# Altium PCB plug.PcbDoc
Units mm, origin at the board's own origin, x right, y up, seen from the top; angles counter-clockwise.
Board outline 151 x 86.38 mm, 2 copper layers (Top Layer, Bottom Layer); 17 components, 18 nets, 63 pads, 0 vias.
Unrouted connection lines stored in the file: 3.
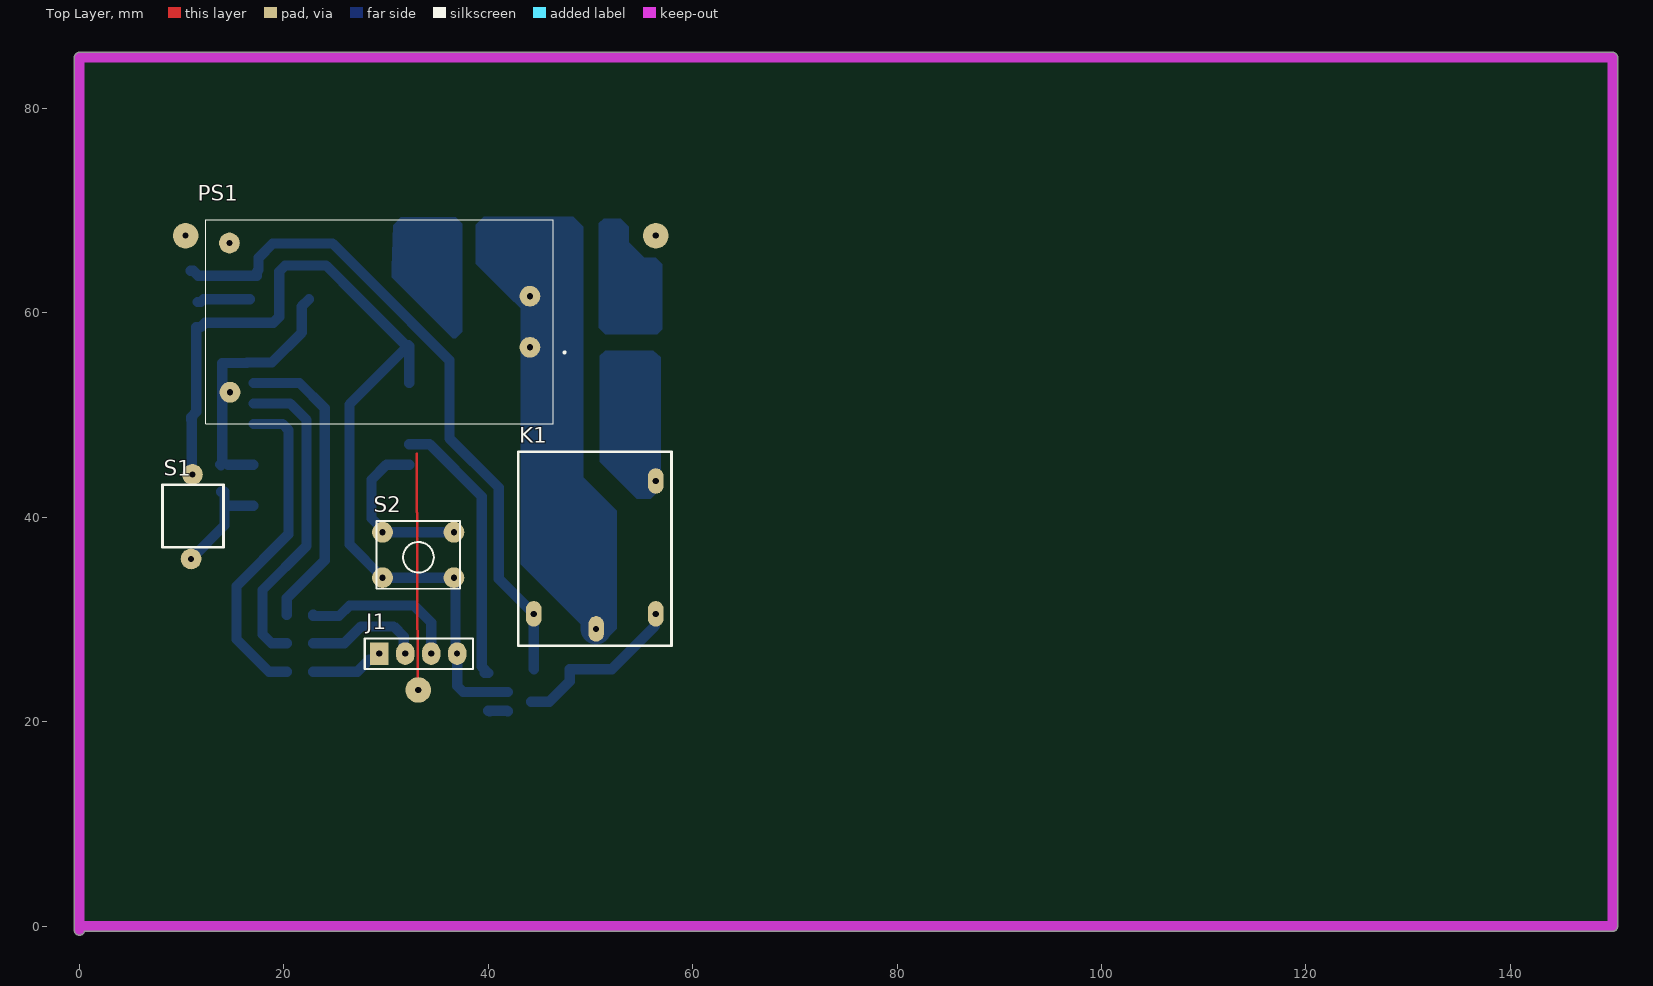
[diagram p0: Top Layer view]
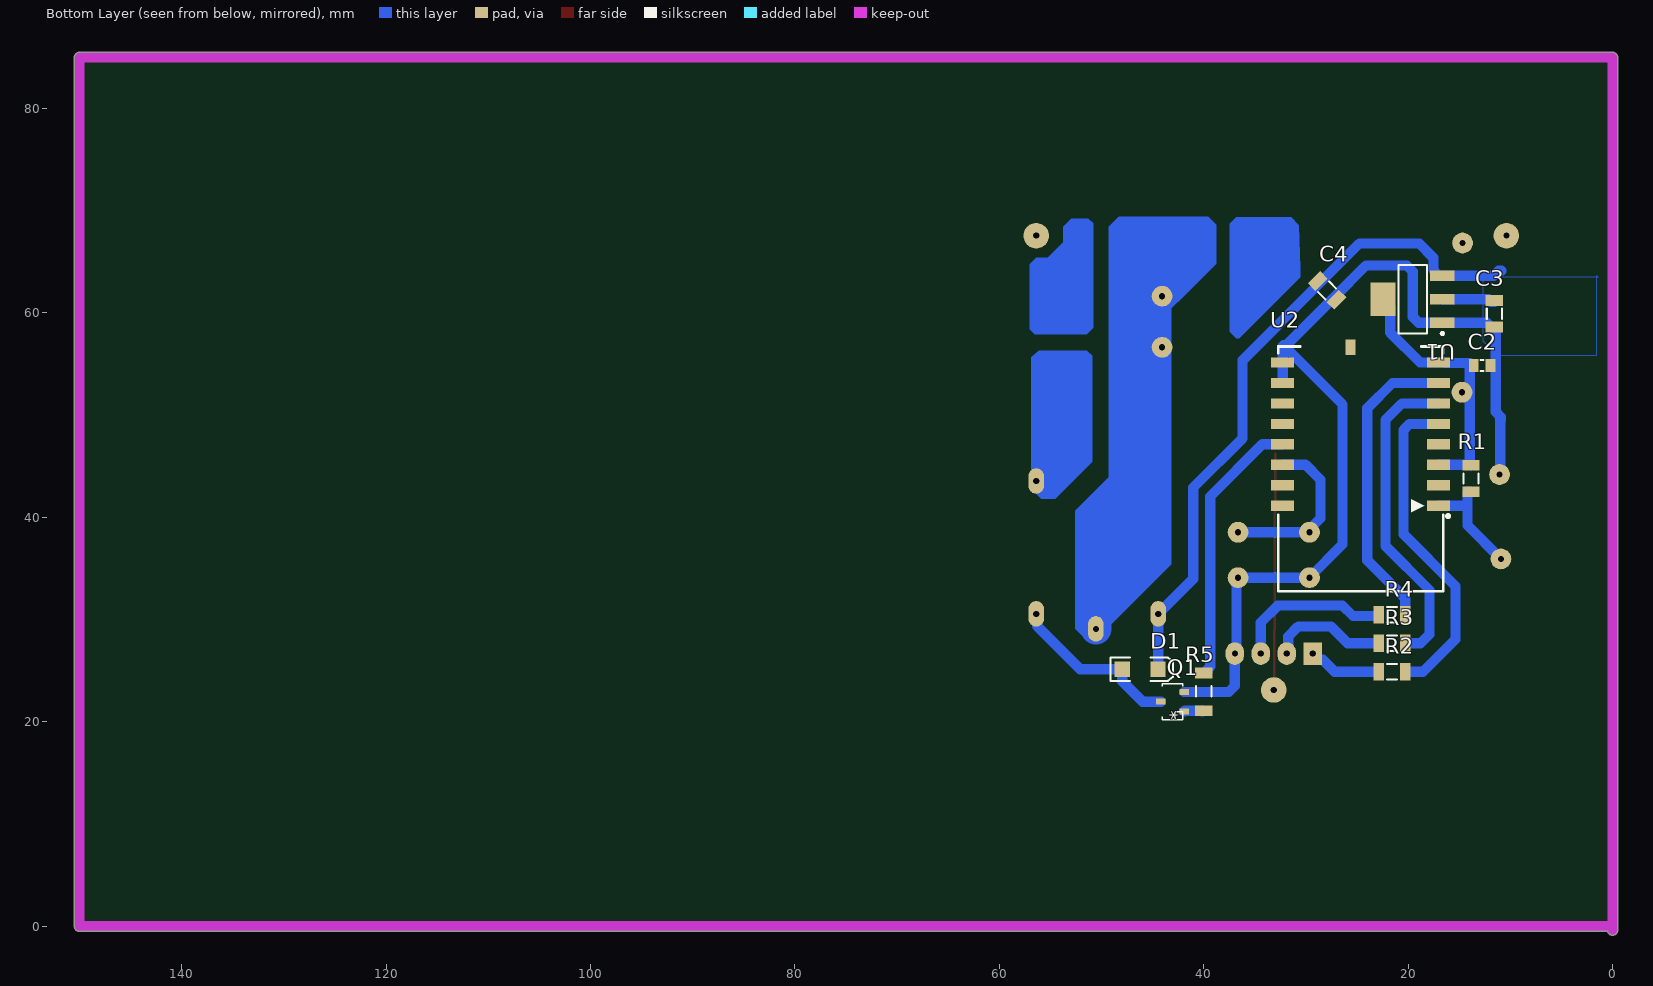
[diagram p1: Bottom Layer view, seen from below]
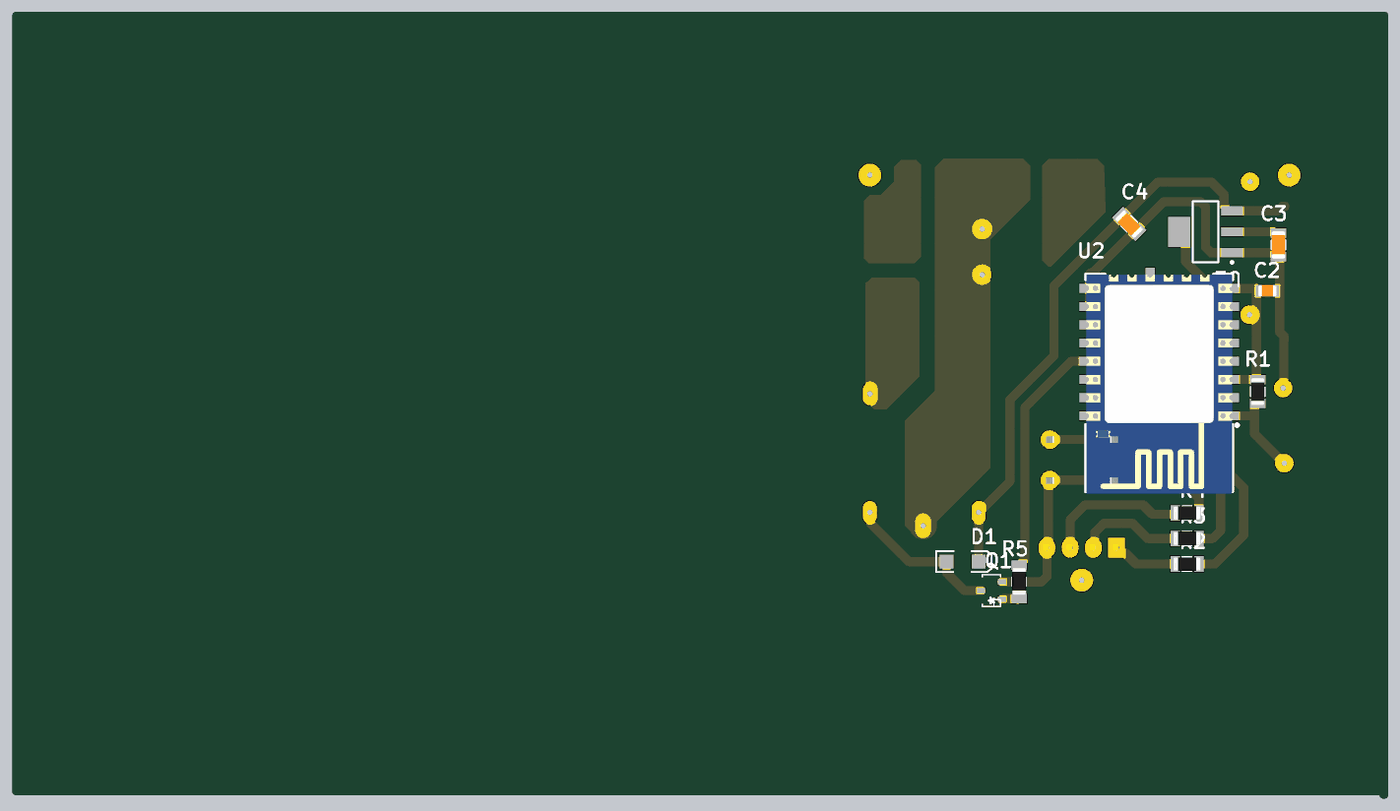
[diagram p2: 3D render of the assembled board from below, using the file's embedded part models]

## Layer stack, top to bottom
Top Solder: solder mask 0.0102, Solder Resist, Dk 3.5
Top Layer: signal copper 0.0356
Dielectric 1: dielectric 0.32, FR-4, Dk 4.8
Bottom Layer: signal copper 0.0356
Bottom Solder: solder mask 0.0102, Solder Resist, Dk 3.5

## Board outline
-0.5,-0.381 -0.5,85 cw(c0,85) 0,85.5 150,85.5 cw(c150,85) 150.5,85 150.5,0 cw(c150,0) 150,-0.5 0.486,-0.5 cw(c0,-0.381)

## Design rules (kind name [scope] priority, off if disabled: settings)
Clearance Clearance_1 [InPolygon] p1: gap=0.8 ignorepadtopadclearanceinfootprint=FALSE
Clearance [All] p2: gap=0.254 ignorepadtopadclearanceinfootprint=FALSE except(0: Arc-Hole Track-Hole SMDPad-Hole THPad-Hole Via-Hole Fill-Hole Poly-Hole Region-Hole Text-Hole)
PolygonConnect [All] p1: connectstyle=Relief reliefconductorwidth=0.254 reliefentries=4 polygonreliefangle="90 Angle" airgapwidth=0.254
RoomDefinition plug [InComponentClass('plug')] p1: confinementstyle=ConfineIn formatcopy=TRUE lockcomponents=FALSE outline 144.907,-4.953 247.904,-4.953 247.904,23.114 144.907,23.114
RoutingLayers [All] p1: top layer_v5=FALSE bottom layer_v5=TRUE
RoutingVias [All] p1: holewidth=0.711 width=2.5 viastyle="Through Hole" minholewidth=0.711 minwidth=1.27 maxholewidth=0.711 maxwidth=2
SolderMaskExpansion [All] p1: expansion=0.102 istentingtop=FALSE
Width [All] p1: maxlimit=3 minlimit=0.5 preferedwidth=1
29 further rules are at their usual default settings.

## Components (designator, comment, footprint, x,y, rotation, side; value= is the part's Value field where it differs from the comment)
C2 "=Value" "CAP 0805" 12.7,54.864 r180 bottom
C3 "=Value" "CAP 1206" 11.557,59.944 r270 bottom
C4 "=Value" "CAP 1206" 27.94,62.23 r225 bottom
D1 "D Tunnel1" 3.2X1.6X1.1 46.228,25.146 r180 bottom
J1 "Header4X1" "HEADER 4X1" 29.337,26.67 r0 top
K1 "Relay-12vDC" Relays 42.926,27.432 r0 top
PS1 "HLK-PM01" HLKPM01 44.069,56.642 r180 top
Q1 "MMBT3904-TP" SOT23-3 43.046,20.701 r90 bottom
R1 "10K" "RES 1206 (3216X08L)"#1 13.843,43.815 r270 bottom
R2 "10K" "RES 1206 (3216X08L)"#1 21.59,24.892 r180 bottom
R3 "10K" "RES 1206 (3216X08L)"#1 21.59,27.686 r180 bottom
R4 "10K" "RES 1206 (3216X08L)"#1 21.59,30.48 r180 bottom
R5 "10K" "RES 1206 (3216X08L)"#2 40.005,22.987 r270 bottom
S1 "PB-2pin" PB-2pin 8.128,43.18 r270 top
S2 "PUSH BUTTON DOUBLE" "PUSH BUTTON" 33.147,36.322 r180 top
U1 "LM1117MP-3.3" MP04A_N 19.558,61.341 r0 bottom
U2 "ESP_12_E" ESP_12_E 16.643,41.148 r0 bottom

## Footprints (in the part's own frame and the unit in brackets; to place one, negate y for a bottom-side part, rotate by r counter-clockwise, add the part's x,y. Pads: shape width x height; smd on the part's side, far side on the other; paste and mask are expansions set on the pad)
3.2X1.6X1.1 [mm] "SMT LED; 2 Flat Leads"
  rect 1.5x1.5 smd: 1(-1.75,0) 2(1.75,0)
  silkscreen extent -2.9,-1.15 3.2,1.15
"CAP 0805" [mm]
  rect 0.95x1.3 smd: 1(-0.889,0) 2(0.761,0)
  silkscreen extent -0.21,-0.55 0.09,0.55, body extent -1.08,-0.64 0.95,0.63, height 0.65
"CAP 1206" [mm]
  rect 1.05x1.7 smd: 1(-1.27,0) 2(1.326,0)
  silkscreen extent -0.47,-0.75 0.53,0.75, body extent -1.49,-0.77 1.55,0.75, height 0.75
ESP_12_E [mm] "ESP-12 Wi-Fi Module by AI-Thinker"
  rect 2.25x1 smd: 1(0.375,0) 2(0.375,-2) 3(0.375,-4) 4(0.375,-6) 5(0.375,-8) 6(0.375,-10) 7(0.375,-12) 8(0.375,-14) 15(15.625,-14) 16(15.625,-12) 17(15.625,-10) 18(15.625,-8) 19(15.625,-6) 20(15.625,-4) 21(15.625,-2) 22(15.625,0)
  rect 1x1.5 smd: 12(9,-15.5)
  silkscreen extent -0.7,-15.57 16.08,8.37, body extent 0,-15.49 16,8.51, height 2.75
"HEADER 4X1" [mm]
  rect 1.8x2.2 hole 0.6: 1(0,0)
  oval 1.8x2.2 hole 0.6: 2(2.54,0) 3(5.08,0) 4(7.62,0)
  silkscreen extent -1.43,-1.5 9.18,1.5, body extent -1.19,-1.22 8.97,1.32, height 8.38
HLKPM01 [mil]
  round 80 hole 23.62: 1(0,0) 2(0,-196.85) 3(1155,173.15) 4(1157.48,-401.57)
  silkscreen extent -138,-492 1248,295
MP04A_N [mm] "SOT223, 4-Leads, Body 6.5x3.5mm, Pitch 2.3mm, Lead Span 7mm, IPC Medium Density"
  rect 2.4x1 smd: 1(-2.9,2.3) 2(-2.9,0) 3(-2.9,-2.3)
  rect 2.4x3.3 smd: 4(2.9,0)
  silkscreen extent -3.02,-3.35 1.4,3.47, body extent -1.85,-3.35 1.85,3.35, height 1.8
PB-2pin [mil] "Switch"
  round 80 hole 23.62: 1(-40,115) 2(285,110)
  silkscreen extent 0,0 240,235
"PUSH BUTTON" [mil]
  round 80 hole 23.62: 1(-137.5,87.5) 2(137.5,87.5) 3(-137.5,-87.5) 4(137.5,-87.5)
  silkscreen extent -160,-130 160,130, body extent -155,-121 157,123, height 205
Relays [mil]
  oval 60x98.43 hole 23.62: 1(300,65) 3(530,635) 4(60,123.11) 5(530,123.11)
  silkscreen extent 0,0 591,748
"RES 1206 (3216X08L)"#1 [mm] "Chip Resistor, 2-Leads, Body 3.2x1.6mm, IPC High Density _ (0.125 W)"
  rect 1.05x1.7 smd: 1(-1.295,0) 2(1.301,0)
  silkscreen extent -0.5,-0.75 0.5,0.75, body extent -1.52,-0.76 1.53,0.76, height 0.6
"RES 1206 (3216X08L)"#2 [mm] "Chip Resistor, 2-Leads, Body 3.2x1.6mm, IPC High Density _ (0.125 W)"
  rect 1.05x1.7 smd: 1(-1.778,0) 2(1.905,0)
  silkscreen extent -0.5,-0.75 0.5,0.75, body extent -1.52,-0.76 1.53,0.76, height 0.6
SOT23-3 [mm]
  rect 0.6x0.9 smd: 1(0.32,-1.15) 2(2.22,-1.15) 3(1.27,1.15)
  silkscreen extent -0.48,-1 3.02,1

## Part data
C2 C3 C4: library part Capacitor, "Capacitor"
D1: "Tunnel Diode - RLC Model", LatestRevisionDate=17-Jul-2002, LatestRevisionNote="Re-released for DXP Platform.", PackageDescription="SM LED; 2 Flat Leads", PackageReference=3.2X1.6X1.1, PackageVersion=Feb-2002, Published=8-Jun-2000, Publisher="Altium Limited"
K1: library part Relay-05vDC, "Relay-05vDC-240AC 5A", ComponentLinkURL=www.picpars.com, Designer="Seyed Mohsen Ghasemain"
PS1: "<b>Ultra-compact power module</b><p> Source: <a href=\"https://datasheet.lcsc.com/szlcsc/1906201102_HI-LINK-HLK-PM03_C209904.pdf\"> Datasheet </a>", Package="Package Analog Devices", Availability=Unavailable, MF=Hi-link, MP=hlk-pm01, Price=None, SnapEDA_Link=https://www.snapeda.com/parts/hlk-pm01/Hi-link/view-part/2875605/?ref=snap
Q1: "Bipolar _BJT_ Transistor NPN 40V 200mA 300MHz 350mW Surface Mount SOT-23", Package="SOT-23 Micro Commercial", Availability=Unavailable, MF="Micro Commercial", MP=MMBT3904-TP, Price=None, SnapEDA_Link=https://www.snapeda.com/parts/MMBT3904-TP/Micro%20Commercial/view-part/805928/?ref=snap
R1 R2 R3 R4 R5: library part Resistor, "Resistor", Power="1/4 W", Tolerance=5%
S1 S2: "Switch"
  S1: Designer="Seyed Mohsen Ghasemian", E-mail=picpars@gmail.com, Publisher=www.picpars.com, WEB=www.picpars.com
U1: "800mA Low-Dropout Linear Regulator", DigiKeyPartNumber=LM1117MP-3.3CT-ND, Manufacturer="National Semiconductor", PackageTopMarking=XYTT*N05A, PowerWise=N, Code_IPC=SOT223-4, Code_JEDEC=TO-261-AA, ComponentLink1Description="LM1117 Datasheet", ComponentLink1URL=http://www.national.com/ds/LM/LM1117.pdf, ComponentLink2Description="LM1117 Web Page", ComponentLink2URL=http://www.national.com/pf/LM/LM1117.html, ComponentLink3Description="MP04A Package Page", ComponentLink3URL=http://www.national.com/packaging/folders/mp04a.html, CompType="LDO IC", DatasheetVersion=Apr-2006, PackageDescription="Molded SOT-223, 6.50 x 3.56 x 1.6mm Body, 4 Lead, 2.3mm Pitch", PackageReference=MP04A, PackageVersion="revB, Apr-2003", PartNumber=LM1117MP-3.3, PinCount=4, Published=4-Dec-2008, Publisher="Altium Limited", RoHS=O
U2: "ESP-12 Wi-Fi Module by AI-Thinker", IC=ESP8266-EX, Vendor=Ai-thinker

## Free pads (board coordinates)
  round 2.5 hole 0.6: 5(10.388,67.564) 6(56.388,67.564) 7(33.147,23.114)

## Nets (pads, with @x,y where several pads share a name; then routed paths per layer and width w, separated by ;. In a path a pad name is that pad's centre, name@x,y a point inside that pad or via, vN(x,y) a via of type N, cw(c..) or ccw(c..) an arc to the next point about the centre after c; other vN are vias at no path point)
btn: U2.18
faz: K1.1 PS1.1 | length 26.2
  Bottom Layer w3: 46.736,53.721 46.736,38.481 50.546,34.671 K1.1
GND: C2.2 C3.2 C4.2 J1.4 PS1.3 Q1.2 S1.1 S2.1 S2.2 U1.1 U2.15 U2.16 | length 96.8
  Bottom Layer w1: S1.1 10.986,44.259 10.986,49.466 10.922,49.53 10.922,49.809 11.43,50.317 11.43,58.593 11.455,58.618 C3.2 11.882,58.618 12.305,59.041 U1.1 18.972,59.041 19.558,59.627 19.558,64.057 20.144,64.643 24.13,64.643 27.241,61.531 32.067,56.706 ; U2.16 U2.15 32.268,56.759 32.194,56.832 26.416,51.054 26.416,37.356 29.654,34.118 S2.2 S2.1 36.804,33.935 36.804,26.823 J1.4 36.957,23.507 37.543,22.921 Q1.2
NetD1_1: D1.1 K1.3 K1.5 Q1.3 | length 17.1
  Bottom Layer w1: Q1.3 45.974,21.971 47.978,23.975 D1.1 52.07,25.146 56.288,29.364 56.288,30.459 K1.5
NetJ1_1: J1.1 R2.1 | length 7.3
  Bottom Layer w1: R2.1 27.178,24.892 28.356,26.07 28.937,26.07 29.337,26.47 J1.1
NetJ1_2: J1.2 R3.1 | length 11.7
  Bottom Layer w1: R3.1 25.908,27.686 27.559,29.337 30.734,29.337 31.724,28.347 31.724,26.823 J1.2
NetJ1_3: J1.3 R4.1 | length 15.8
  Bottom Layer w1: R4.1 22.885,30.378 22.91,30.353 25.4,30.353 26.416,31.369 32.766,31.369 34.417,29.718 J1.3
NetQ1_1: Q1.1 R5.2 | length 2
  Bottom Layer w1: R5.2 41.835,21.082 Q1.1 ; R5.2@40.146,21.021 R5.2@40.146,21.057
NetR2_2: R2.2 U2.5 | length 32.5
  Bottom Layer w1: U2.5 19.861,49.148 20.447,48.562 20.447,38.354 15.367,33.274 15.367,28.067 18.542,24.892 R2.2
NetR3_2: R3.2 U2.6 | length 31.4
  Bottom Layer w1: U2.6 20.607,51.148 22.225,49.53 22.225,37.211 17.907,32.893 17.907,28.575 18.796,27.686 R3.2
NetR4_2: R4.2 U2.7 | length 29.7
  Bottom Layer w1: U2.7 21.528,53.148 24.003,50.673 24.003,35.814 20.289,32.1 R4.2
nol: PS1.2
o1esp: R5.1 U2.19 | length 26.9
  Bottom Layer w1: U2.19 34.259,47.148 39.37,42.037 39.37,25.4 39.655,25.115 39.655,24.79 39.68,24.765 R5.1
o2esp: S2.3 S2.4 U2.20 | length 16.9
  Bottom Layer w1: U2.20 30.035,45.148 28.575,43.688 28.575,39.903 29.654,38.824 S2.4 S2.3
rst: R1.2 S1.2 U2.1 | length 10.5
  Bottom Layer w1: S1.2 14.193,39.212 14.193,42.489 14.168,42.514 R1.2 ; 14.779,41.148 U2.1
s1: U2.12
vcc: C4.1 D1.2 K1.4 PS1.4 U1.3 | length 66.2
  Bottom Layer w1: 10.859,64.128 11.138,64.128 11.625,63.641 U1.3 17.358,63.641 17.358,64.059 17.526,64.227 17.526,65.405 18.923,66.802 24.765,66.802 28.639,62.928 36.195,55.372 36.195,47.752 41.021,42.926 41.021,33.988 K1.4 44.45,25.174 D1.2
vesp: C2.1 C3.1 R1.1 U1.2 U1.4 U2.3 U2.8 | length 29.7
  Bottom Layer w1: C3.1@11.557,61.087 11.882,61.087 12.136,61.341 U1.2 ; R1.1@13.784,45.17 R1.1 ; 13.97,45.734 13.97,55.118 16.363,55.118 16.393,55.148 U2.8 18.826,55.148 21.758,58.08 21.758,60.641 U1.4 ; R1.1@14.556,45.148 U2.3
pads on no net: U2.2 U2.4 U2.17 U2.21 U2.22
copper on no net: | length 23
  Top Layer w0.254: 33.02,46.228 33.082,23.228

## Polygon pours and split planes (outlines as drawn)
faz on Bottom Layer "NONET_L02_P003" (solid, shelved, pour order 3): 1.397,63.5 12.7,63.5 12.7,57.277 11.303,55.88 1.524,55.88 1.524,63.627
no net on Bottom Layer "NONET_L02_P001" (solid, pour order 1): 6.985,67.691

## Keep-outs
Keep-Out Layer:
  lines w1: 0,-0.381 0,85 150,85 150,0 0,0

## Other copper
Bottom Layer:
  region net faz: 43.18,52.377 43.18,35.433 49.149,29.464
  region net faz: 43.18,60.452 43.18,59.055 43.18,44.958 47.244,40.894 47.244,31.369 50.546,28.067 51.562,28.067 52.578,29.083 52.578,40.64 49.276,43.942 49.276,57.912 46.609,60.325 46.609,63.246 46.482,63.119 40.513,63.119
  region: 51.308,69.215 52.959,69.215 53.721,68.453 53.721,66.929 55.245,65.405 56.388,65.405 57.023,64.77 57.023,58.42 56.515,57.912 51.435,57.912 50.8,58.547 50.8,68.758
  region: 62.738,57.531
  region net NetD1_1: 56.134,56.325 51.435,56.325 50.927,55.816 50.927,45.466 54.546,41.846 55.88,41.846 56.896,42.862 56.896,55.689
  region net faz: 39.56,69.406 48.324,69.405 49.276,68.453 49.276,57.912 48.641,57.277 46.355,57.277 38.798,64.834 38.798,68.644
  region net nol: 30.684,68.593 31.433,69.342 36.83,69.342 37.465,68.707 37.465,58.166 36.83,57.531 36.512,57.531 30.544,63.5 30.544,64.389

## Silkscreen, mask and mechanical layers (free items; w line width, h text height)
Mechanical 1:
  lines w0.2: 20.755,19.596 48.552,19.596 58.255,29.299 58.255,29.596 58.255,69.596 8.255,69.596 8.255,29.651 8.255,29.337 17.996,19.596 45.755,19.596

## Text inside footprints (layer, text, board x,y; h text height)
Q1: Bottom Overlay "*" at 42.046,20.221 h1.27 r270
U2: Mechanical 13 "CUTOUT POLYGON" at 16.77,33.782 h0.25 r180; Mechanical 13 "ANTENNA AREA" at 16.77,33.274 h0.25 r180